# EAGLE board CT_schematic (EAGLE 7.6.0)

Size 100 x 80 mm. Coordinates in mm from the lower left corner, seen from the top.
Outline: 0,0 100,0 100,80 0,80 0,0
Copper layers (1*16): Top 0.035mm / dielectric 1.5mm / Bottom 0.035mm
Design rules "default": minimum track width 10mil, minimum drill 24mil, track to track 8mil, track to pad 8mil, pad to pad 8mil, via to via 8mil, smd to smd 8mil, copper to edge 40mil, drill to drill 8mil, minimum pad ring 10mil, minimum via ring 8mil, stop-mask expansion 4mil, vias tented up to drill 0mil, thermal gap 10mil

## Footprints (pad centres in the part's own frame; a part is rotated, then mirrored left to right if it is on the bottom)
C0603 = smd 0.8 x 0.8: 1 -0.762,0; 2 0.762,0
C0402 = smd 0.5 x 0.5: 1 -0.508,0; 2 0.508,0
C0805 = smd 1.2 x 1.3: 1 -1.016,0; 2 1.016,0
C1210 = smd 1.2 x 2.5: 1 -1.524,0; 2 1.524,0
C1206 = smd 1.3 x 1.6: 1 -1.524,0; 2 1.524,0
L0603 = smd 0.8 x 0.8: 1 -0.762,0; 2 0.762,0
DR1040 = smd 1.6 x 3.2: 1 -4.458,0; 2 4.458,0
R0603 = smd 0.8 x 0.8: 1 -0.762,0; 2 0.762,0
LQFP208 = smd 0.3 x 1.2: 1 -12.75,-14.4; 2 -12.25,-14.4; 3 -11.75,-14.4; 4 -11.25,-14.4; 5 -10.75,-14.4; 6 -10.25,-14.4; 7 -9.75,-14.4; 8 -9.25,-14.4; 9 -8.75,-14.4; 10 -8.25,-14.4; 11 -7.75,-14.4; 12 -7.25,-14.4; 13 -6.75,-14.4; 14 -6.25,-14.4; 15 -5.75,-14.4; 16 -5.25,-14.4; 17 -4.75,-14.4; 18 -4.25,-14.4; 19 -3.75,-14.4; 20 -3.25,-14.4; 21 -2.75,-14.4; 22 -2.25,-14.4; 23 -1.75,-14.4; 24 -1.25,-14.4; 25 -0.75,-14.4; 26 -0.25,-14.4; 27 0.25,-14.4; 28 0.75,-14.4; 29 1.25,-14.4; 30 1.75,-14.4; 31 2.25,-14.4; 32 2.75,-14.4; 33 3.25,-14.4; 34 3.75,-14.4; 35 4.25,-14.4; 36 4.75,-14.4; 37 5.25,-14.4; 38 5.75,-14.4; 39 6.25,-14.4; 40 6.75,-14.4; 41 7.25,-14.4; 42 7.75,-14.4; 43 8.25,-14.4; 44 8.75,-14.4; 45 9.25,-14.4; 46 9.75,-14.4; 47 10.25,-14.4; 48 10.75,-14.4; 49 11.25,-14.4; 50 11.75,-14.4; 51 12.25,-14.4; 52 12.75,-14.4; 105 12.75,14.4; 106 12.25,14.4; 107 11.75,14.4; 108 11.25,14.4; 109 10.75,14.4; 110 10.25,14.4; 111 9.75,14.4; 112 9.25,14.4; 113 8.75,14.4; 114 8.25,14.4; 115 7.75,14.4; 116 7.25,14.4; 117 6.75,14.4; 118 6.25,14.4; 119 5.75,14.4; 120 5.25,14.4; 121 4.75,14.4; 122 4.25,14.4; 123 3.75,14.4; 124 3.25,14.4; 125 2.75,14.4; 126 2.25,14.4; 127 1.75,14.4; 128 1.25,14.4; 129 0.75,14.4; 130 0.25,14.4; 131 -0.25,14.4; 132 -0.75,14.4; 133 -1.25,14.4; 134 -1.75,14.4; 135 -2.25,14.4; 136 -2.75,14.4; 137 -3.25,14.4; 138 -3.75,14.4; 139 -4.25,14.4; 140 -4.75,14.4; 141 -5.25,14.4; 142 -5.75,14.4; 143 -6.25,14.4; 144 -6.75,14.4; 145 -7.25,14.4; 146 -7.75,14.4; 147 -8.25,14.4; 148 -8.75,14.4; 149 -9.25,14.4; 150 -9.75,14.4; 151 -10.25,14.4; 152 -10.75,14.4; 153 -11.25,14.4; 154 -11.75,14.4; 155 -12.25,14.4; 156 -12.75,14.4 | smd 1.2 x 0.3: 53 14.4,-12.75; 54 14.4,-12.25; 55 14.4,-11.75; 56 14.4,-11.25; 57 14.4,-10.75; 58 14.4,-10.25; 59 14.4,-9.75; 60 14.4,-9.25; 61 14.4,-8.75; 62 14.4,-8.25; 63 14.4,-7.75; 64 14.4,-7.25; 65 14.4,-6.75; 66 14.4,-6.25; 67 14.4,-5.75; 68 14.4,-5.25; 69 14.4,-4.75; 70 14.4,-4.25; 71 14.4,-3.75; 72 14.4,-3.25; 73 14.4,-2.75; 74 14.4,-2.25; 75 14.4,-1.75; 76 14.4,-1.25; 77 14.4,-0.75; 78 14.4,-0.25; 79 14.4,0.25; 80 14.4,0.75; 81 14.4,1.25; 82 14.4,1.75; 83 14.4,2.25; 84 14.4,2.75; 85 14.4,3.25; 86 14.4,3.75; 87 14.4,4.25; 88 14.4,4.75; 89 14.4,5.25; 90 14.4,5.75; 91 14.4,6.25; 92 14.4,6.75; 93 14.4,7.25; 94 14.4,7.75; 95 14.4,8.25; 96 14.4,8.75; 97 14.4,9.25; 98 14.4,9.75; 99 14.4,10.25; 100 14.4,10.75; 101 14.4,11.25; 102 14.4,11.75; 103 14.4,12.25; 104 14.4,12.75; 157 -14.4,12.75; 158 -14.4,12.25; 159 -14.4,11.75; 160 -14.4,11.25; 161 -14.4,10.75; 162 -14.4,10.25; 163 -14.4,9.75; 164 -14.4,9.25; 165 -14.4,8.75; 166 -14.4,8.25; 167 -14.4,7.75; 168 -14.4,7.25; 169 -14.4,6.75; 170 -14.4,6.25; 171 -14.4,5.75; 172 -14.4,5.25; 173 -14.4,4.75; 174 -14.4,4.25; 175 -14.4,3.75; 176 -14.4,3.25; 177 -14.4,2.75; 178 -14.4,2.25; 179 -14.4,1.75; 180 -14.4,1.25; 181 -14.4,0.75; 182 -14.4,0.25; 183 -14.4,-0.25; 184 -14.4,-0.75; 185 -14.4,-1.25; 186 -14.4,-1.75; 187 -14.4,-2.25; 188 -14.4,-2.75; 189 -14.4,-3.25; 190 -14.4,-3.75; 191 -14.4,-4.25; 192 -14.4,-4.75; 193 -14.4,-5.25; 194 -14.4,-5.75; 195 -14.4,-6.25; 196 -14.4,-6.75; 197 -14.4,-7.25; 198 -14.4,-7.75; 199 -14.4,-8.25; 200 -14.4,-8.75; 201 -14.4,-9.25; 202 -14.4,-9.75; 203 -14.4,-10.25; 204 -14.4,-10.75; 205 -14.4,-11.25; 206 -14.4,-11.75; 207 -14.4,-12.25; 208 -14.4,-12.75
LGA-16 = smd 1.5 x 0.4: 1 -2.1,0.975; 2 -2.1,0.325; 3 -2.1,-0.325; 4 -2.1,-0.975; 9 2.1,-0.975; 10 2.1,-0.325; 11 2.1,0.325; 12 2.1,0.975 | smd 0.4 x 1.5: 5 -0.975,-2.1; 6 -0.325,-2.1; 7 0.325,-2.1; 8 0.975,-2.1; 13 0.975,2.1; 14 0.325,2.1; 15 -0.325,2.1; 16 -0.975,2.1
MOLEX_47219-2001 = smd 0.8 x 1.5: 1 3.2,-2.1; 2 2.1,-2.1; 3 1,-2.1; 4 -0.1,-2.1; 5 -1.2,-2.1; 6 -2.3,-2.1; 7 -3.4,-2.1; 8 -4.5,-2.1 | smd 1.5 x 2.05: G1 6.875,-4.7; G2 6.875,3.6; G3 -6.875,3.6; G4 -6.875,-4.7
USON-8 = smd 0.3 x 0.4: 1 0,0; 2 0.5,0; 3 1,0; 4 1.5,0; 5 1.5,2.4; 6 1,2.4; 7 0.5,2.4; 8 0,2.4 | smd 1.65 x 0.25: 9 0.75,1.2
FCI_10118193-0001LF = smd 0.4 x 1.35: 1 -1.3,2.675; 2 -0.65,2.675; 3 0,2.675; 4 0.65,2.675; 5 1.3,2.675 | smd 1.6 x 1.4: 6 -3.2,2.45; 7 3.2,2.45 | smd 1.9 x 1.9: 8 -1.2,0; 9 1.2,0 | hole 0.5: -3.3,0; 3.3,0
SOT143B = smd 1 x 0.7: 1 -0.75,-1 | smd 0.6 x 0.7: 2 0.95,-1; 3 0.95,1; 4 -0.95,1
ABS07-32.768KHZ-7-T = smd 1.1 x 2.4: 1 -2.5,0; 2 0,0
ABLS-25.000MHZ-B2F-T = smd 5.6 x 2.8: 1 -3.81,0; 2 5.69,0
TSOT-23-5 = smd 1.3 x 0.62: 1 -1.31,0.95; 2 -1.31,0; 3 -1.31,-0.95; 4 1.31,-0.95; 5 1.31,0.95
WSON-8 = smd 0.3 x 0.6: 1 -0.75,0; 2 0.05,0; 3 0.85,0; 4 1.65,0; 5 1.65,3.8; 6 0.85,3.8; 7 0.05,3.8; 8 -0.75,3.8 | smd 3 x 2.6: PAD 0.45,1.9
DFN8_2X3MC = smd 0.813 x 0.305: 1 -1.398,0.75; 2 -1.398,0.25; 3 -1.398,-0.25; 4 -1.398,-0.75; 5 1.398,-0.75; 6 1.398,-0.25; 7 1.398,0.25; 8 1.398,0.75 | smd 1.753 x 1.549: 9 0,0
JST-2-SMD = smd 1 x 4.6: 1 -1,-3.7; 2 1,-3.7 | smd 1.6 x 3.4: NC1 -3.4,1.5; NC2 3.4,1.5
SON-6 = smd 0.55 x 0.3: 1 -0.355,0.5 | smd 0.52 x 0.3: 2 -0.37,0; 3 -0.37,-0.5; 4 0.37,-0.5; 5 0.37,0; 6 0.37,0.5
SW_4-1437565-2 = smd 1.4 x 2.1: 1 -2.23,4.55; 2 -2.23,-4.55; 3 2.23,4.55; 4 2.23,-4.55
LGM67K-G1J2-24-Z = smd 0.8 x 1.4: A -2,0; C 0,0
NC7SZ125M5X = smd 1.3 x 0.7: 1 -1.3,0.95; 2 -1.3,0; 3 -1.3,-0.95; 4 1.3,-0.95; 5 1.3,0.95
DUMMY_PACKAGE_194 = drill 0.3: 1 0,-1; 2 1.5,-1; 3 3,-1

## Placement (x,y rotation side)
C1  1e-06  [C0603]  -26.67,72.39 0 top  (outside the outline)
C2  1e-07  [C0603]  -30.48,72.39 0 top  (outside the outline)
C3  1e-07  [C0603]  -34.29,72.39 0 top  (outside the outline)
C4  1e-07  [C0603]  -38.1,72.39 0 top  (outside the outline)
C5  1e-07  [C0603]  -41.91,72.39 0 top  (outside the outline)
C6  1e-07  [C0603]  -45.72,72.39 0 top  (outside the outline)
C7  1e-07  [C0603]  -49.53,72.39 0 top  (outside the outline)
C8  1e-07  [C0603]  -53.34,72.39 0 top  (outside the outline)
C9  1e-07  [C0603]  -57.15,72.39 0 top  (outside the outline)
C10  1e-07  [C0603]  -60.96,72.39 0 top  (outside the outline)
C11  1e-07  [C0603]  -64.77,72.39 0 top  (outside the outline)
C12  1e-07  [C0603]  -68.58,72.39 0 top  (outside the outline)
C13  1e-07  [C0603]  -72.39,72.39 0 top  (outside the outline)
C14  1e-07  [C0603]  -15.24,77.47 0 top  (outside the outline)
C15  1e-07  [C0603]  -19.05,77.47 0 top  (outside the outline)
C16  1e-07  [C0603]  -22.86,77.47 0 top  (outside the outline)
C17  1e-07  [C0603]  -26.67,77.47 0 top  (outside the outline)
C18  1e-07  [C0603]  -30.48,77.47 0 top  (outside the outline)
C19  1e-07  [C0603]  -34.29,77.47 0 top  (outside the outline)
C20  4.7e-06  [C0603]  -74.93,67.31 0 top  (outside the outline)
C21  2.2e-06  [C0603]  -15.24,72.39 0 top  (outside the outline)
C22  2.2e-06  [C0603]  -19.05,72.39 0 top  (outside the outline)
C23  1e-08  [C0603]  -38.1,77.47 0 top  (outside the outline)
C24  1e-06  [C0603]  -41.91,77.47 0 top  (outside the outline)
C25  1e-07  [C0603]  -45.72,77.47 0 top  (outside the outline)
C26  1e-11  [C0402]  -68.58,77.47 0 top  (outside the outline)
C27  1e-11  [C0402]  -72.39,77.47 0 top  (outside the outline)
C28  1e-11  [C0402]  -76.2,77.47 0 top  (outside the outline)
C29  1e-11  [C0402]  -15.24,82.55 0 top  (outside the outline)
C31  1e-08  [C0402]  -19.05,82.55 0 top  (outside the outline)
C32  1e-08  [C0402]  -22.86,82.55 0 top  (outside the outline)
C33  1e-08  [C0402]  -26.67,82.55 0 top  (outside the outline)
C34  4.7e-07  [C0603]  -22.86,72.39 0 top  (outside the outline)
C35  1e-07  [C0402]  -30.48,82.55 0 top  (outside the outline)
C36  1e-05  [C0805]  -53.34,54.61 0 top  (outside the outline)
C37  1e-07  [C0402]  -34.29,82.55 0 top  (outside the outline)
C38  1e-05  [C0805]  -58.42,54.61 0 top  (outside the outline)
C39  1e-05  [C0805]  -63.5,54.61 0 top  (outside the outline)
C40  1e-06  [C0603]  -49.53,77.47 0 top  (outside the outline)
C41  1e-05  [C1210]  -29.21,55.88 0 top  (outside the outline)
C42  1e-07  [C0402]  -38.1,82.55 0 top  (outside the outline)
C43  1e-05  [C1206]  -35.56,55.88 0 top  (outside the outline)
C44  1e-05  [C1206]  -41.91,55.88 0 top  (outside the outline)
C45  1e-08  [C0402]  -41.91,82.55 0 top  (outside the outline)
F1  240.0  [L0603]  -53.34,77.47 0 top  (outside the outline)
I1  3.8e-06  [DR1040]  -38.1,36.83 0 top  (outside the outline)
R2  1000.0  [R0603]  -57.15,77.47 0 top  (outside the outline)
R4  4700.0  [R0603]  -60.96,77.47 0 top  (outside the outline)
R5  10000.0  [R0603]  -30.48,67.31 0 top  (outside the outline)
R6  10000.0  [R0603]  -35.56,67.31 0 top  (outside the outline)
R7  10000.0  [R0603]  -40.64,67.31 0 top  (outside the outline)
R8  10000.0  [R0603]  -45.72,67.31 0 top  (outside the outline)
R9  100000.0  [R0603]  -21.59,62.23 0 top  (outside the outline)
R10  100000.0  [R0603]  -26.67,62.23 0 top  (outside the outline)
R11  100000.0  [R0603]  -31.75,62.23 0 top  (outside the outline)
R12  100000.0  [R0603]  -36.83,62.23 0 top  (outside the outline)
R13  100000.0  [R0603]  -41.91,62.23 0 top  (outside the outline)
R14  100000.0  [R0603]  -46.99,62.23 0 top  (outside the outline)
R15  100000.0  [R0603]  -52.07,62.23 0 top  (outside the outline)
R16  100000.0  [R0603]  -57.15,62.23 0 top  (outside the outline)
R17  100000.0  [R0603]  -62.23,62.23 0 top  (outside the outline)
R18  490000.0  [R0603]  -67.31,62.23 0 top  (outside the outline)
R19  1000000.0  [R0603]  -16.51,62.23 0 top  (outside the outline)
R20  100000.0  [R0603]  -72.39,62.23 0 top  (outside the outline)
R21  91000.0  [R0603]  -50.8,67.31 0 top  (outside the outline)
R22  100000.0  [R0603]  -15.24,67.31 0 top  (outside the outline)
R23  10000.0  [R0603]  -55.88,67.31 0 top  (outside the outline)
R24  10000.0  [R0603]  -60.96,67.31 0 top  (outside the outline)
R25  82000.0  [R0603]  -66.04,67.31 0 top  (outside the outline)
R26  300000.0  [R0603]  -20.32,67.31 0 top  (outside the outline)
R27  120000.0  [R0603]  -25.4,67.31 0 top  (outside the outline)
R28  2000.0  [R0603]  -64.77,77.47 0 top  (outside the outline)
R29  10000.0  [R0603]  -71.12,67.31 0 top  (outside the outline)
U1  STM32F746BET6  [LQFP208]  -27.94,15.24 0 top  (outside the outline)
U2  l3g4200d  [LGA-16]  -68.58,46.99 0 top  (outside the outline)
U3  0472192001  [MOLEX_47219-2001]  -53.34,8.89 0 top  (outside the outline)
U4  SST26WF080BT-104I/NP  [USON-8]  -45.72,81.28 0 top  (outside the outline)
U5  10118193-0001LF  [FCI_10118193-0001LF]  -19.05,46.99 0 top  (outside the outline)
U6  prtr5v0u2ax  [SOT143B]  -58.42,82.55 0 top  (outside the outline)
U7  ABS07-32.768KHZ-7-T  [ABS07-32.768KHZ-7-T]  -60.96,46.99 0 top  (outside the outline)
U8  ABLS-25.000MHZ-B2F-T  [ABLS-25.000MHZ-B2F-T]  -38.1,46.99 0 top  (outside the outline)
U9  ltc3406es5  [TSOT-23-5]  -68.58,54.61 0 top  (outside the outline)
U10  LP2951ACSDX/NOPB  [WSON-8]  -74.93,33.02 0 top  (outside the outline)
U11  MCP73831T-2ACI/MC  [DFN8_2X3MC]  -73.66,81.28 0 top  (outside the outline)
U12  S2B-PH-SM4-TB(LF)(SN)  [JST-2-SMD]  -53.34,36.83 0 top  (outside the outline)
U13  TPS3895ADRYR  [SON-6]  -67.31,81.28 0 top  (outside the outline)
U14  4-1437565-2  [SW_4-1437565-2]  -27.94,36.83 0 top  (outside the outline)
U15  Q65110A2395  [LGM67K-G1J2-24-Z]  -17.78,55.88 0 top  (outside the outline)
U16  nc7sz125m5x  [NC7SZ125M5X]  -46.99,54.61 0 top  (outside the outline)
U17  Dummy  [DUMMY_PACKAGE_194]  -64.77,82.55 0 top  (outside the outline)

## Library data of the parts
C1-C29 C31-C45 F1 I1 R2 R4-R29 U1-U17 = circuit_tree

## Nets
CLK_CRYSTAL_U1_9: C26.1 U1.9 U7.1
CLK_CRYSTAL_U1_10: C27.1 U1.10 U7.2
CLK_CRYSTAL_U1_32: C28.1 U1.32 U8.1
CLK_CRYSTAL_U1_33: C29.1 U1.33 U8.2
GND: C1.2 C2.2 C3.2 C4.2 C5.2 C6.2 C7.2 C8.2 C9.2 C10.2 C11.2 C12.2 C13.2 C14.2 C15.2 C16.2 C17.2 C18.2 C19.2 C20.2 C21.2 C22.2 C23.2 C24.2 C25.2 C26.2 C27.2 C28.2 C29.2 C31.2 C32.2 C33.2 C35.2 C36.2 C37.2 C38.2 C39.1 C39.2 C40.2 C41.2 C42.2 C43.2 C44.2 C45.2 R2.2 R5.2 R7.1 R7.2 R18.2 R22.2 R25.2 R27.2 R28.2 U1.14 U1.25 U1.40 U1.51 U1.60 U1.72 U1.82 U1.93 U1.114 U1.125 U1.136 U1.149 U1.170 U1.184 U1.202 U2.8 U2.9 U2.10 U2.11 U2.12 U2.13 U3.6 U3.G1 U3.G2 U3.G3 U3.G4 U4.4 U4.9 U5.5 U5.6 U5.7 U5.8 U5.9 U6.1 U9.2 U10.3 U10.4 U10.PAD U11.6 U11.9 U12.2 U13.2 U15.C U16.1 U16.3 U17.1
INPUT_USBPOWER_5V: C43.1 R29.2 U5.1 U6.4 U11.1 U11.2
NET_U1_34: R4.1 U1.34 U16.4
NET_U1_42: C23.1 C24.1 F1.1 U1.41 U1.42
NET_U1_92: C21.1 U1.92
NET_U1_148: C22.1 U1.148
NET_U1_197: R5.1 U1.197
NET_U1_203: R6.1 U1.203
NET_U1_207: U15.A
NET_U1_208: U14.3 U14.4
NET_U2_14: C33.1 C34.1 U2.14
NET_U2_ATNET_1: C34.2
NET_U9_1: U9.1
NET_U9_3: I1.1 U9.3
NET_U9_5: R18.1 R19.1 U9.5
NET_U9_ATNET_3: I1.2 R19.2
NET_U10_5: R20.1 U10.5
NET_U10_7: R21.2 R22.1 U10.7
NET_U11_5: R29.1 U11.5
NET_U11_8: R28.1 U11.8
NET_U13_1: R24.1 R25.1 U13.1
NET_U13_3: R26.2 R27.1 U13.3
NET_U13_4: R23.1 U13.4 U16.2
NET_U14_1: R2.1 U14.1 U14.2
PROC_PE3: U1.2 U17.2
PROC_PE4: U1.3 U17.3
PROC_QUADSPI_BK1_IO0: U1.29 U4.5
PROC_QUADSPI_BK1_IO1: U1.30 U4.2
PROC_QUADSPI_BK1_IO2: R16.1 U1.1 U4.3
PROC_QUADSPI_BK1_IO3: R17.1 U1.27 U4.7
PROC_QUADSPI_BK1_NCS: R15.1 U1.195 U4.1
PROC_QUADSPI_CLK: U1.63 U4.6
PROC_SDMMC1_CK: R10.1 U1.163 U3.5
PROC_SDMMC1_CMD: R9.1 U1.166 U3.3
PROC_SDMMC1_D0: R11.1 U1.140 U3.7
PROC_SDMMC1_D1: R12.1 U1.141 U3.8
PROC_SDMMC1_D2: R13.1 U1.161 U3.1
PROC_SDMMC1_D3: R14.1 U1.162 U3.2
PROC_SPI1_MISO: U1.55 U2.4
PROC_SPI1_MOSI: U1.56 U2.3
PROC_SPI1_NSS: R8.1 U1.53 U2.5
PROC_SPI1_SCK: U1.54 U2.2
PROC_USB_OTG_FS_DM: U5.2 U6.3
PROC_USB_OTG_FS_DP: U5.3 U6.2
VCC_S1_3V7: C38.1 C40.1 C44.1 U9.4 U10.8 U11.3 U11.4 U12.1
VCC_TIER1_1V8: C1.1 C2.1 C3.1 C4.1 C5.1 C6.1 C7.1 C8.1 C9.1 C10.1 C11.1 C12.1 C13.1 C14.1 C15.1 C16.1 C17.1 C18.1 C19.1 C20.1 C25.1 C32.1 C35.1 C36.1 C37.1 C39.2 C42.1 C45.1 F1.2 I1.2 R4.2 R6.2 R8.2 R9.2 R10.2 R11.2 R12.2 R13.2 R14.2 R15.2 R16.2 R17.2 R19.2 R23.2 R24.2 R26.1 U1.6 U1.15 U1.26 U1.39 U1.52 U1.59 U1.73 U1.83 U1.94 U1.103 U1.115 U1.124 U1.137 U1.150 U1.158 U1.171 U1.185 U1.204 U2.1 U3.4 U4.8 U13.6 U16.5
VCC_TIER1_2V5: C31.1 C41.1 R20.2 R21.1 U2.15 U2.16 U10.1

## Tracks (layer width: path | path; a pad name or v marks a point on that pad's centre or on a via)
CLK_CRYSTAL_U1_9  (2 unrouted)
CLK_CRYSTAL_U1_10  (2 unrouted)
CLK_CRYSTAL_U1_32  (2 unrouted)
CLK_CRYSTAL_U1_33  (2 unrouted)
GND  (98 unrouted)
INPUT_USBPOWER_5V  (5 unrouted)
NET_U1_34  (2 unrouted)
NET_U1_42  (4 unrouted)
NET_U1_92  (1 unrouted)
NET_U1_148  (1 unrouted)
NET_U1_197  (1 unrouted)
NET_U1_203  (1 unrouted)
NET_U1_208  (1 unrouted)
NET_U2_14  (2 unrouted)
NET_U9_3  (1 unrouted)
NET_U9_5  (2 unrouted)
NET_U9_ATNET_3  (1 unrouted)
NET_U10_5  (1 unrouted)
NET_U10_7  (2 unrouted)
NET_U11_5  (1 unrouted)
NET_U11_8  (1 unrouted)
NET_U13_1  (2 unrouted)
NET_U13_3  (2 unrouted)
NET_U13_4  (2 unrouted)
NET_U14_1  (2 unrouted)
PROC_PE3  (1 unrouted)
PROC_PE4  (1 unrouted)
PROC_QUADSPI_BK1_IO0  (1 unrouted)
PROC_QUADSPI_BK1_IO1  (1 unrouted)
PROC_QUADSPI_BK1_IO2  (2 unrouted)
PROC_QUADSPI_BK1_IO3  (2 unrouted)
PROC_QUADSPI_BK1_NCS  (2 unrouted)
PROC_QUADSPI_CLK  (1 unrouted)
PROC_SDMMC1_CK  (2 unrouted)
PROC_SDMMC1_CMD  (2 unrouted)
PROC_SDMMC1_D0  (2 unrouted)
PROC_SDMMC1_D1  (2 unrouted)
PROC_SDMMC1_D2  (2 unrouted)
PROC_SDMMC1_D3  (2 unrouted)
PROC_SPI1_MISO  (1 unrouted)
PROC_SPI1_MOSI  (1 unrouted)
PROC_SPI1_NSS  (2 unrouted)
PROC_SPI1_SCK  (1 unrouted)
PROC_USB_OTG_FS_DM  (1 unrouted)
PROC_USB_OTG_FS_DP  (1 unrouted)
VCC_S1_3V7  (7 unrouted)
VCC_TIER1_1V8  (68 unrouted)
VCC_TIER1_2V5  (6 unrouted)